# EAGLE board nano_bt (EAGLE 9.5.0)
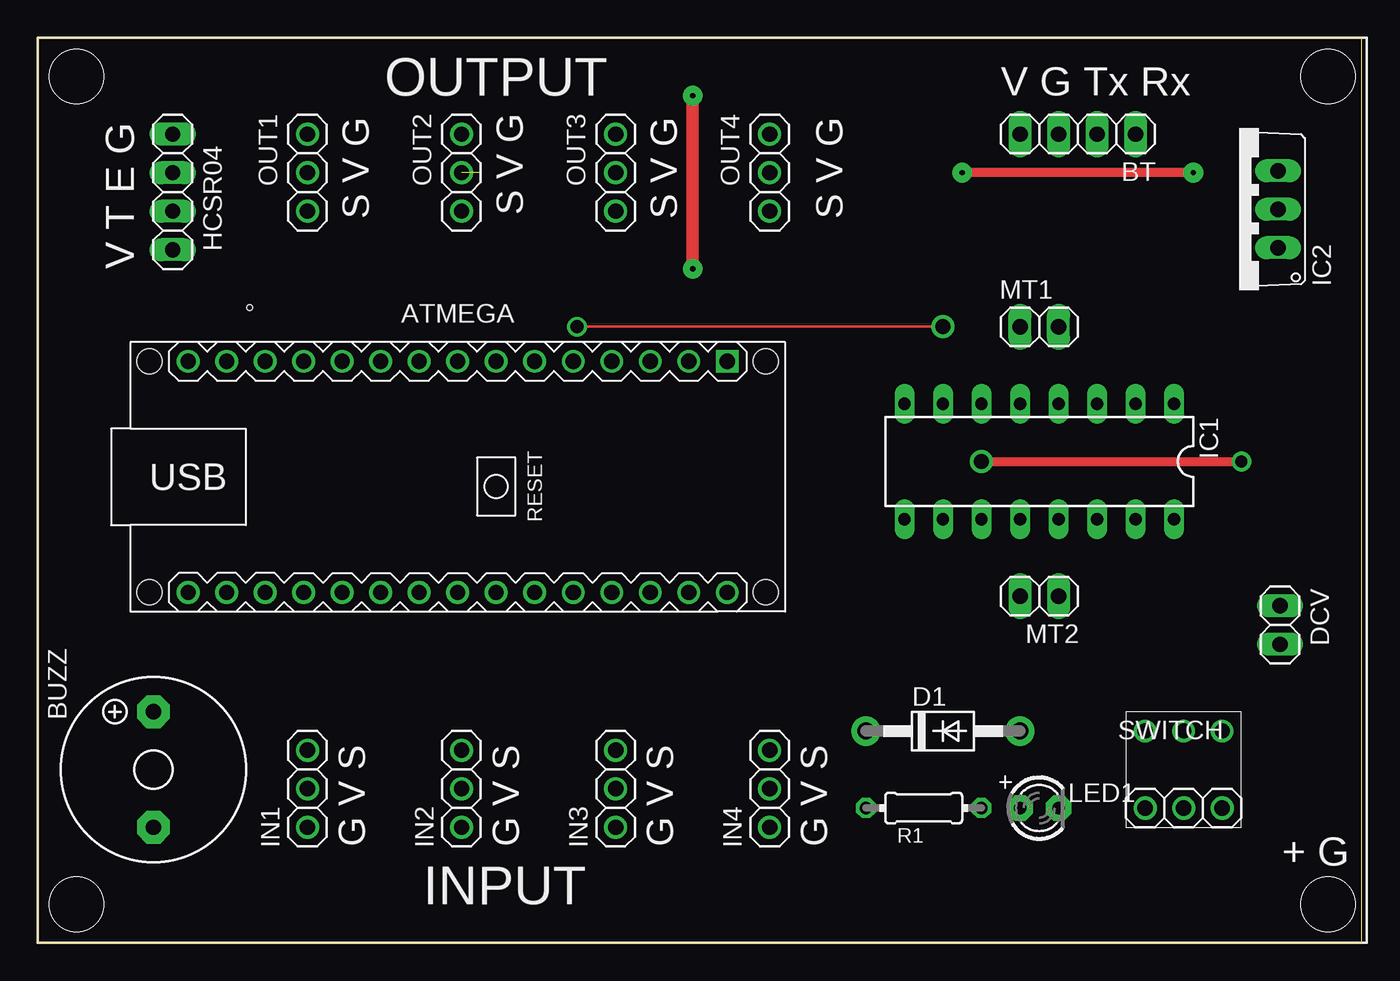
[diagram p0: board, top side]
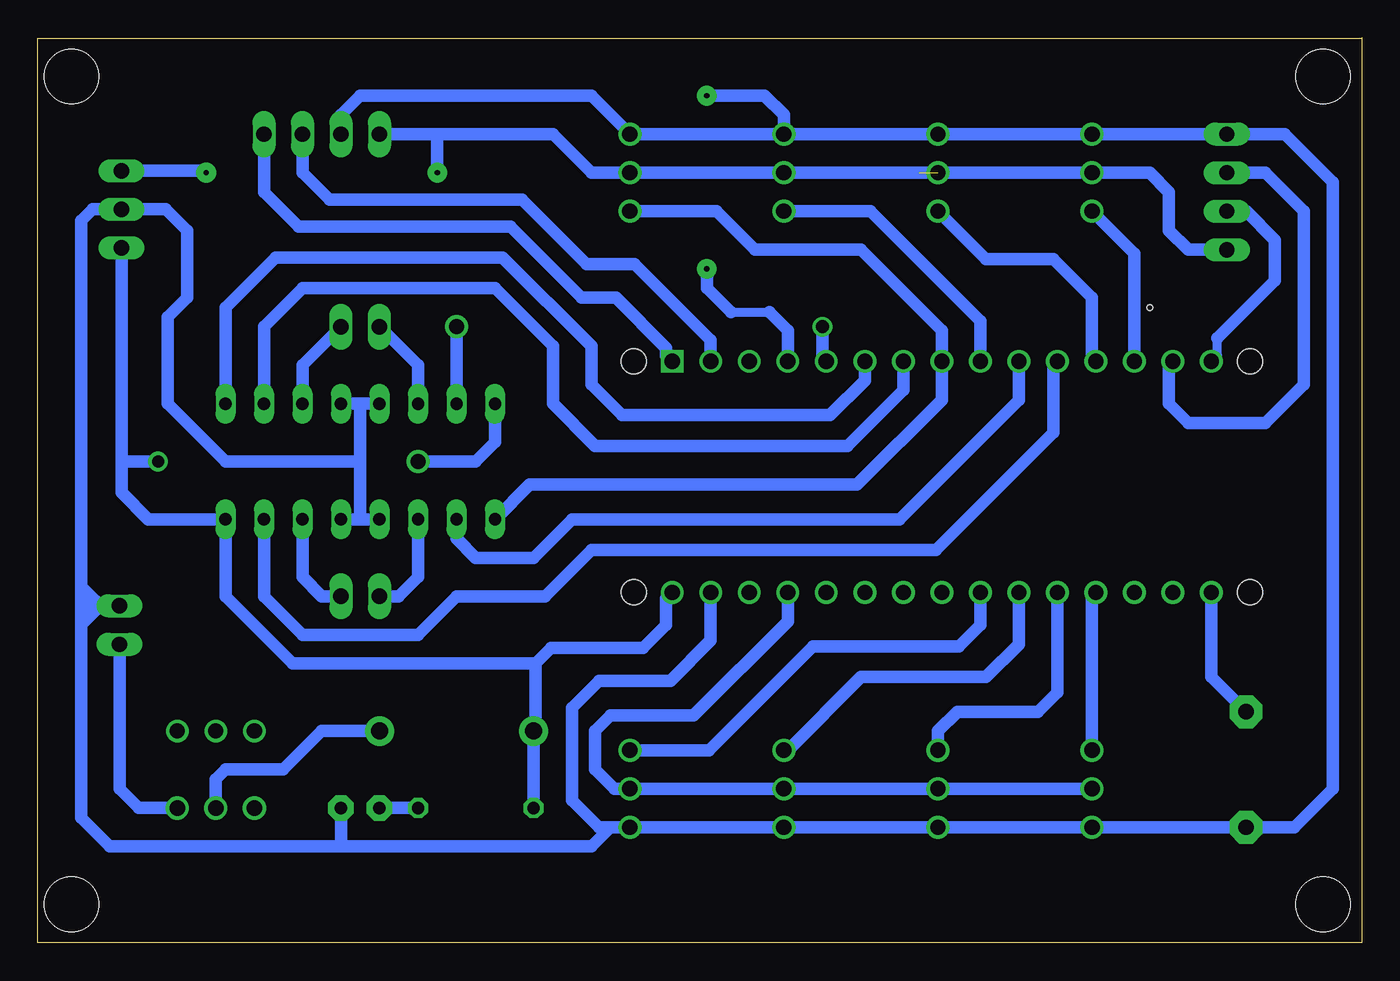
[diagram p1: board, bottom side, seen from below]

Size 87.3 x 59.69 mm. Coordinates in mm from the lower left corner, seen from the top.
Outline: 0,59.68 87.3,59.68 87.3,0 0,0 0,59.69
Copper layers (1*16): Top 0.035mm / dielectric 1.5mm / Bottom 0.035mm
Design rules "default": minimum track width 6mil, minimum drill 0.35mm, track to track 6mil, track to pad 6mil, pad to pad 6mil, via to via 6mil, smd to smd 6mil, copper to edge 40mil, drill to drill 6mil, minimum pad ring 10mil, minimum via ring 8mil, stop-mask expansion 4mil, vias tented up to drill 0mil, thermal gap 10mil
Holes 0.35 mm at 13.97,41.91

## Footprints (pad centres in the part's own frame; a part is rotated, then mirrored left to right if it is on the bottom)
ARDUINO-NANO-3.0 = drill 1 square: J1.1 17.78,7.62 | drill 1: J1.2 15.24,7.62; J1.3 12.7,7.62; J1.4 10.16,7.62; J1.5 7.62,7.62; J1.6 5.08,7.62; J1.7 2.54,7.62; J1.8 0,7.62; J1.9 -2.54,7.62; J1.10 -5.08,7.62; J1.11 -7.62,7.62; J1.12 -10.16,7.62; J1.13 -12.7,7.62; J1.14 -15.24,7.62; J1.15 -17.78,7.62; J2.1 17.78,-7.62; J2.2 15.24,-7.62; J2.3 12.7,-7.62; J2.4 10.16,-7.62; J2.5 7.62,-7.62; J2.6 5.08,-7.62; J2.7 2.54,-7.62; J2.8 0,-7.62; J2.9 -2.54,-7.62; J2.10 -5.08,-7.62; J2.11 -7.62,-7.62; J2.12 -10.16,-7.62; J2.13 -12.7,-7.62; J2.14 -15.24,-7.62; J2.15 -17.78,-7.62 | hole 1.651: -20.32,7.62; -20.32,-7.62; 20.32,-7.62; 20.32,7.62
1X04 = drill 1.016 long: 1 -3.81,0; 2 -1.27,0; 3 1.27,0; 4 3.81,0
F/TMB = drill 1.016 pad 2.159 octagon: + 3.81,0; - -3.81,0
DO41-10 = drill 1.118 pad 1.93: A 5.08,0; C -5.08,0
1X02 = drill 1.016 long: 1 -1.27,0; 2 1.27,0
DIL16 = drill 0.813 long: 1 -8.89,-3.81; 2 -6.35,-3.81; 3 -3.81,-3.81; 4 -1.27,-3.81; 5 1.27,-3.81; 6 3.81,-3.81; 7 6.35,-3.81; 8 8.89,-3.81; 9 8.89,3.81; 10 6.35,3.81; 11 3.81,3.81; 12 1.27,3.81; 13 -1.27,3.81; 14 -3.81,3.81; 15 -6.35,3.81; 16 -8.89,3.81
TO220V = drill 1.016 long: 1 -2.54,-2.54; 2 0,-2.54; 3 2.54,-2.54
1X03 = drill 1.016: 1 -2.54,0; 2 0,0; 3 2.54,0
LED3MM = drill 0.813 pad 1.676 octagon: A -1.27,0; K 1.27,0
0204/7 = drill 0.813 octagon: 1 -3.81,0; 2 3.81,0

## Placement (x,y rotation side)
ATMEGA  ARDUINO-NANO-3.0  [ARDUINO-NANO-3.0]  27.69,30.73 0 top
BT  [1X04]  68.58,53.34 180 top
BUZZ  F/TMB  [F/TMB]  7.62,11.43 90 top
D1  1N4004  [DO41-10]  59.69,13.97 0 top
DCV  [1X02]  81.92,20.95 90 top
HCSR04  [1X04]  8.89,49.53 90 top
IC1  L293D  [DIL16]  66.04,31.75 180 top
IC2  788TV  [TO220V]  79.25,48.39 90 top
IN1  [1X03]  17.78,10.16 90 top
IN2  [1X03]  27.94,10.16 90 top
IN3  [1X03]  38.1,10.16 90 top
IN4  [1X03]  48.26,10.16 90 top
LED1  [LED3MM]  66.04,8.89 0 top
MT1  [1X02]  66.04,40.64 0 top
MT2  [1X02]  66.04,22.86 180 top
OUT1  [1X03]  17.78,50.8 270 top
OUT2  [1X03]  27.94,50.8 270 top
OUT3  [1X03]  38.1,50.8 270 top
OUT4  [1X03]  48.26,50.8 270 top
R1  220  [0204/7]  58.42,8.89 180 top
SWITCH  [1X03]  75.56,8.89 180 top

## Library data of the parts
ATMEGA = diy-modules
BT DCV HCSR04 MT1 MT2 = pinhead
BUZZ = buzzer; OC_FARNELL: unknown; OC_NEWARK: unknown
D1 LED1 SWITCH = adafruit_arduino
IC1 = st-microelectronics; MPN: L293D; OC_FARNELL: 9589619; OC_NEWARK: 56P8249
IC2 = linear
IN1-IN4 OUT1-OUT4 = adafruit
R1 = rcl; SPICEPREFIX: R

## Nets
3V3: ATMEGA.J2.14
A0: ATMEGA.J2.12 IN1.3
A1: ATMEGA.J2.11 IN2.3
A2: ATMEGA.J2.10 IN3.3
A3: ATMEGA.J2.9 IN4.3
EC: ATMEGA.J1.14 HCSR04.3
GND: ATMEGA.J1.4 ATMEGA.J2.2 BT.3 BUZZ.- DCV.2 HCSR04.4 IC1.4 IC1.5 IC1.12 IC1.13 IC2.2 IN1.1 IN2.1 IN3.1 IN4.1 LED1.K OUT1.1 OUT2.1 OUT3.1 OUT4.1
N$1: IC1.3 MT1.2
N$2: IC1.6 MT1.1
N$3: IC1.14 MT2.1
N$4: IC1.11 MT2.2
N$5: ATMEGA.J1.1 BT.1
N$6: ATMEGA.J1.2 BT.2
N$7: ATMEGA.J2.15 BUZZ.+
N$8: ATMEGA.J2.1 D1.C IC1.8 IC1.16 IC2.1 R1.2
N$9: ATMEGA.J1.5 IC1.7
N$10: ATMEGA.J1.6 IC1.1
N$11: ATMEGA.J1.7 IC1.2
N$12: DCV.1 SWITCH.1
N$13: ATMEGA.J1.10 IC1.10
N$14: ATMEGA.J1.11 IC1.15
N$15: D1.A SWITCH.2
N$16: LED1.A R1.1
N$22: ATMEGA.J2.4 IN1.2 IN2.2 IN3.2 IN4.2
O1: ATMEGA.J1.13 OUT1.3
O2: ATMEGA.J1.12 OUT2.3
O3: ATMEGA.J1.9 OUT3.3
O4: ATMEGA.J1.8 IC1.9 OUT4.3
TR: ATMEGA.J1.15 HCSR04.2
VP: BT.4 HCSR04.1 IC2.3 OUT1.2 OUT2.2 OUT3.2 OUT4.2

## Tracks (layer width: path | path; a pad name or v marks a point on that pad's centre or on a via)
A0
  Bottom 0.61: 17.78,22.86 ATMEGA.J2.12
  Bottom 0.813: IN1.3 17.78,22.86
A1
  Bottom 0.813: ATMEGA.J2.11 20.07,16.51 21.34,15.24 26.67,15.24 27.94,13.97 IN2.3
A2
  Bottom 0.61: IN3.3 37.85,12.7
  Bottom 0.813: ATMEGA.J2.10 22.61,19.68 24.77,17.53 33.02,17.53 37.85,12.7
A3
  Bottom 0.813: ATMEGA.J2.9 25.15,20.95 26.54,19.56 36.2,19.56 43.05,12.7 IN4.3
EC
  Bottom 0.61: 12.7,38.1 ATMEGA.J1.14
  Bottom 0.813: HCSR04.3 6.35,50.8 3.81,48.26 3.81,36.83 6.35,34.29 11.43,34.29 12.7,35.56 12.7,38.1
GND  (via drill 0.35 pad 1.3)
  Top 0.813: v43.18,44.45 v43.18,55.88
  Bottom 0.61: 83.19,22.23 83.5,22.54 83.82,22.23 | 41.59,41.59 39.05,41.59
  Bottom 0.813: 49.53,7.62 IN4.1 IN3.1 IN2.1 IN1.1 BUZZ.- 4.45,7.62 1.91,10.16 1.91,50.16 5.08,53.34 HCSR04.4 OUT1.1 OUT2.1 OUT3.1 | 49.53,7.62 50.8,6.35 67.31,6.35 | BT.3 67.31,54.61 66.04,55.88 50.8,55.88 OUT4.1 OUT3.1 | 49.53,7.62 50.29,7.62 52.07,9.4 52.07,15.49 50.29,17.27 45.59,17.27 42.93,19.94 ATMEGA.J2.2 | IC1.4 66.04,35.56 | 66.04,35.56 IC1.5 | 66.04,35.56 66.04,31.75 | 66.04,31.75 66.04,27.94 | 66.04,27.94 IC1.12 | IC1.13 66.04,27.94 | ATMEGA.J1.4 37.85,40.39 39.05,41.59 | v43.18,55.88 39.37,55.88 38.1,54.61 OUT3.1 | 67.31,6.35 82.55,6.35 84.45,8.26 84.45,20.95 | LED1.K 67.31,6.35 | 84.45,23.5 84.45,47.62 83.69,48.39 IC2.2 78.87,48.39 77.47,46.99 77.47,42.55 78.74,41.27 78.74,35.56 74.93,31.75 66.04,31.75 | 84.45,23.5 83.5,22.54 | DCV.2 83.19,22.23 84.45,20.95 | v43.18,44.45 43.18,43.18 41.59,41.59 | 84.45,23.5 84.45,22.23 | 84.45,22.23 84.45,20.95 | 84.45,22.23 83.82,22.23
N$1
  Bottom 0.813: MT1.2 69.85,38.1 IC1.3
N$2
  Bottom 0.813: IC1.6 62.23,38.1 MT1.1
N$3
  Bottom 0.813: MT2.1 68.58,22.86 69.85,24.13 IC1.14
N$4
  Bottom 0.813: MT2.2 63.5,22.86 62.23,24.13 IC1.11
N$5
  Bottom 0.813: BT.1 72.39,49.53 70.1,47.24 56.13,47.24 51.44,42.55 49.16,42.55 45.86,39.24 45.86,38.75 ATMEGA.J1.1
N$6
  Bottom 0.813: BT.2 69.85,50.8 68.07,49.02 55.37,49.02 51.12,44.77 47.94,44.77 42.93,39.75 ATMEGA.J1.2
N$7
  Bottom 0.813: ATMEGA.J2.15 9.91,17.53 BUZZ.+
N$8  (via drill 0.8 pad 1.3, 1 pad 1.3)
  Top 0.61: v62.23,31.75 v79.38,31.75
  Bottom 0.61: D1.C 54.48,14.1
  Bottom 0.813: D1.C R1.2 | ATMEGA.J2.1 45.86,22.72 45.86,20.95 47.38,19.44 53.46,19.44 54.48,18.41 | IC2.1 81.79,31.75 | 81.79,31.75 81.79,29.72 80.01,27.94 IC1.16 74.93,22.86 70.48,18.41 54.48,18.41 | IC1.8 57.15,33.02 58.42,31.75 v62.23,31.75 | v79.38,31.75 81.79,31.75 | 54.48,14.1 54.48,18.41
N$9  (via drill 0.85 pad 1.3, 1 pad 1.3)
  Top 0.152: v59.69,40.64 v35.56,40.64
  Bottom 0.813: IC1.7 v59.69,40.64 | v35.56,40.64 35.56,38.1 ATMEGA.J1.5
N$10
  Bottom 0.813: ATMEGA.J1.6 32.77,37.08 35.05,34.8 48.77,34.8 50.8,36.83 50.8,39.37 56.64,45.21 71.63,45.21 74.93,41.91 IC1.1
N$11
  Bottom 0.813: ATMEGA.J1.7 30.23,36.45 33.91,32.77 50.55,32.77 53.34,35.56 53.34,39.37 57.15,43.18 69.85,43.18 72.39,40.64 IC1.2
N$12
  Bottom 0.813: DCV.1 81.92,10.16 80.64,8.89 SWITCH.1
N$13
  Bottom 0.813: ATMEGA.J1.10 22.61,35.81 30.48,27.94 52.07,27.94 54.61,25.4 58.42,25.4 59.69,26.67 IC1.10
N$14
  Bottom 0.61: ATMEGA.J1.11 20.32,38.1
  Bottom 0.813: 20.32,38.1 20.32,33.66 28.07,25.91 50.8,25.91 53.85,22.86 59.69,22.86 62.23,20.32 69.85,20.32 72.39,22.86 IC1.15
N$15
  Bottom 0.813: SWITCH.2 75.56,10.79 74.93,11.43 71.12,11.43 68.58,13.97 D1.A
N$16
  Bottom 0.813: LED1.A R1.1
N$18  (via drill 1)
  other vias: 73.03,13.97
N$19  (via drill 1)
  other vias: 75.56,13.97
N$20  (via drill 1)
  other vias: 78.11,13.97
N$22
  Bottom 0.813: IN1.2 IN3.2 | IN3.2 IN4.2 49.28,10.16 50.55,11.43 50.55,13.97 49.53,14.99 44.07,14.99 37.85,21.21 ATMEGA.J2.4 | IN2.2 IN3.2
O1
  Bottom 0.813: OUT1.3 14.99,45.47 ATMEGA.J1.13
O2
  Bottom 0.61: 17.78,38.1 ATMEGA.J1.12
  Bottom 0.813: 17.78,38.1 17.78,42.55 20.32,45.09 24.77,45.09 OUT2.3
O3
  Bottom 0.813: ATMEGA.J1.9 25.15,41.02 32.38,48.26 OUT3.3
O4
  Bottom 0.813: OUT4.3 42.55,48.26 40.01,45.72 33.02,45.72 27.69,40.39 ATMEGA.J1.8 27.69,35.81 33.27,30.23 54.86,30.23 IC1.9
TR
  Bottom 0.61: ATMEGA.J1.15 9.51,38.75 9.51,39.88
  Bottom 0.813: HCSR04.2 7.62,48.26 5.71,46.35 5.71,43.67 9.51,39.88
VP  (via drill 0.35 pad 1.3)  (1 unrouted)
  Top 0.61: v76.2,50.8 v60.96,50.8
  Bottom 0.61: OUT1.2 18.03,50.55 | 76.33,50.93 v76.2,50.8
  Bottom 0.813: BT.4 60.96,53.34 | 60.96,53.34 53.34,53.34 50.8,50.8 OUT4.2 OUT3.2 | HCSR04.1 11.43,45.72 12.7,46.99 12.7,49.53 13.97,50.8 OUT1.2 OUT3.2 | 29.21,50.8 OUT3.2 | v60.96,50.8 60.96,53.34 | IC2.3 76.33,50.93

## Text on the board
tNames: OUTPUT | V G Tx Rx | S V G | S V G | S V G | S V G | V T E G | G V S | G V S | G V S | G V S | + G | INPUT